# Allegro board stlink.brd
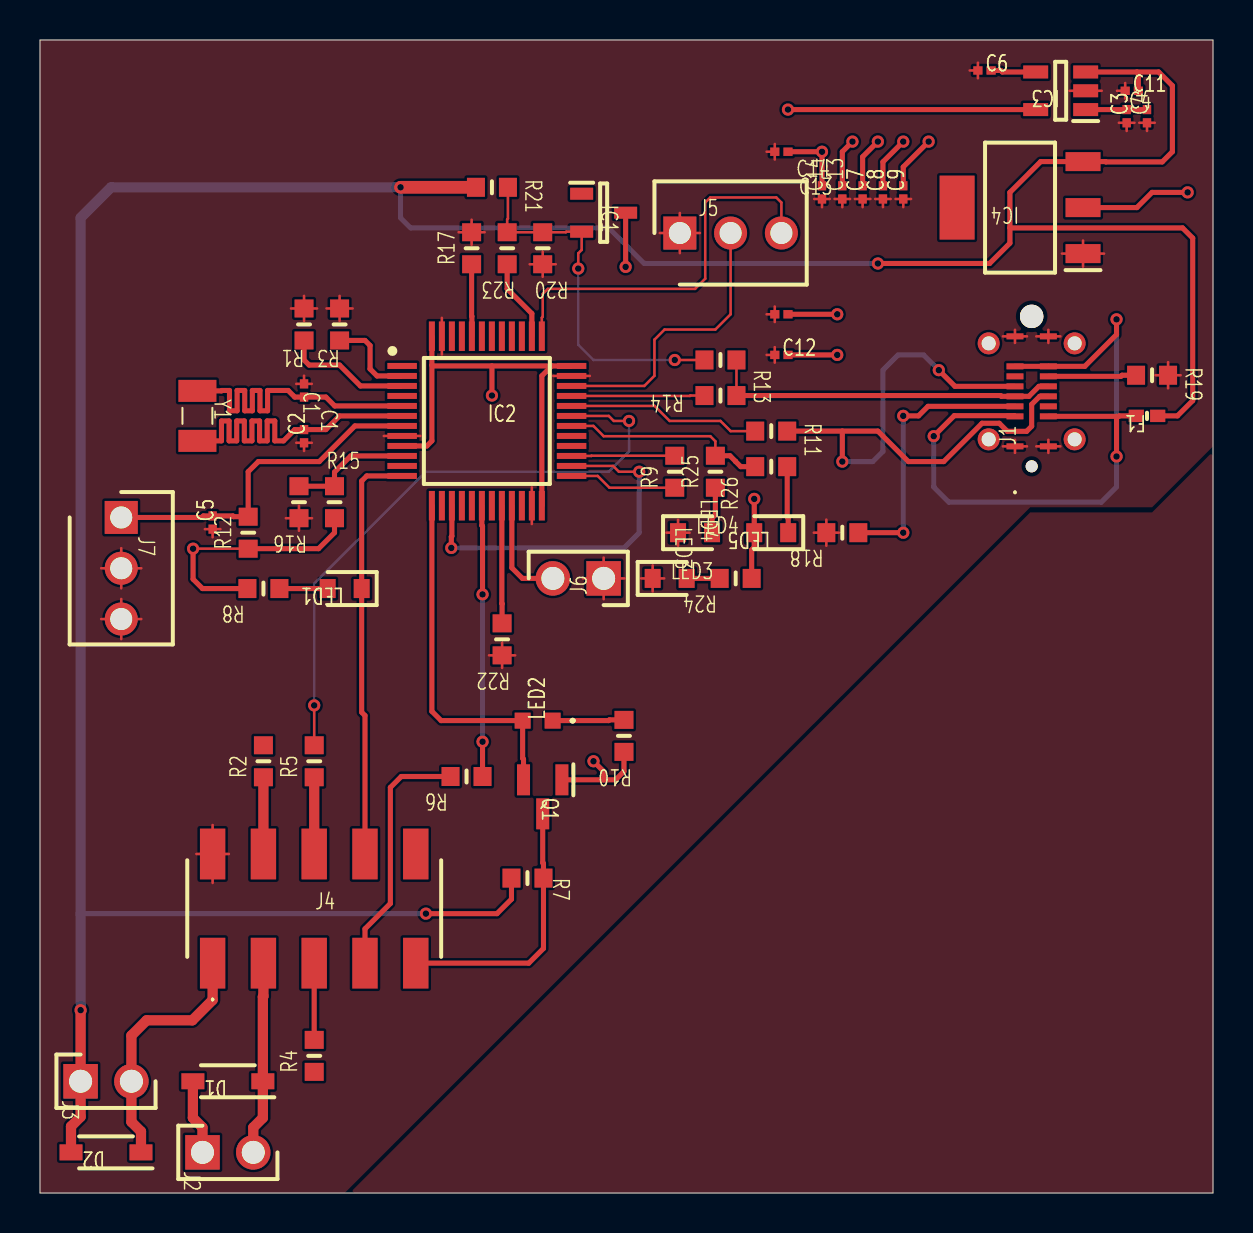
[diagram p0: board, top side]
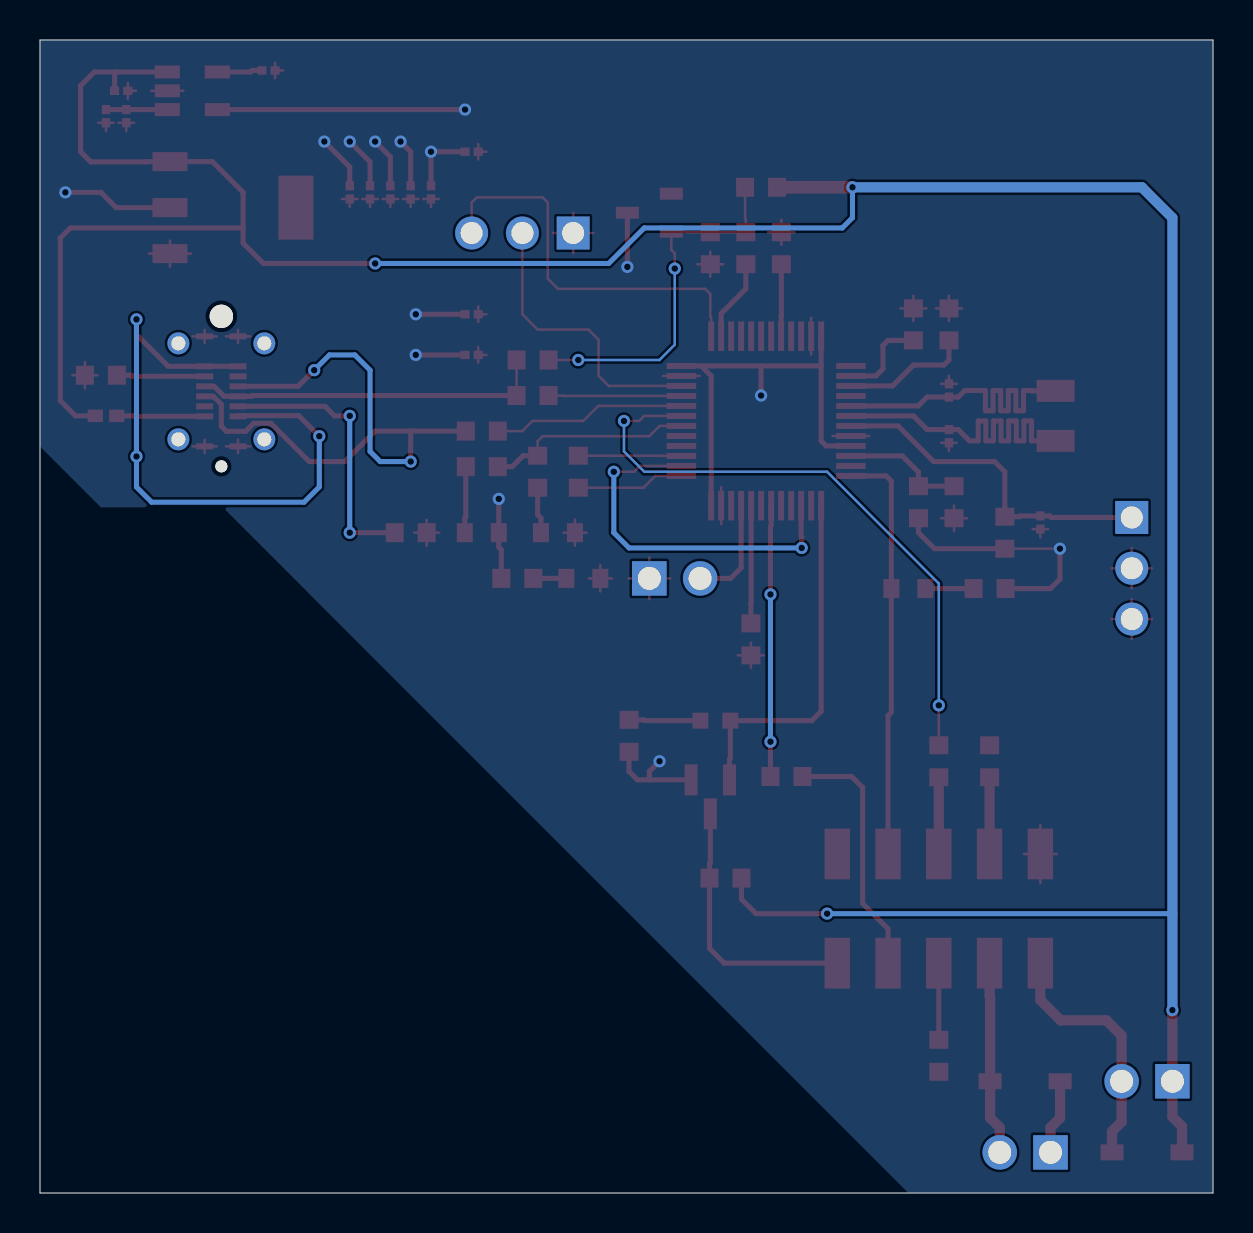
[diagram p1: board, bottom side, seen from below]

Outline 58.67 x 57.66 mm; copper layers: TOP, BOTTOM. Coordinates in mm from the lower left corner of the outline.
Outline path: 0,57.66 0,0 58.67,0 58.67,57.66 0,57.66

## Design rules (mm)
constraint set DEFAULT: min track width 0.127
net group DN: nets DN USB_DM
net group RESET: nets N06427 RESET
net group SWO: nets N06435 SWO
net group +5V: nets DP N06887 N27475 USB_DP
net group LED_LINK: nets LED_LINK N09917 N09921

## Placement (name value [footprint] x y rotation side)
C1  20p  [CAPC0603X33N]  13.21 40.13 270 top
C2  20p  [CAPC0603X33N]  13.21 37.85 90 top
C3  1u  [CAPC0603X33N]  54.36 53.85 90 top
C4  100n  [CAPC0603X33N]  55.37 53.85 90 top
C5  100n  [CAPC0603X33N]  8.64 33.53 90 top
C6  22n  [CAPC0603X33N]  47.24 56.13 0 top
C7  10u  [CAPC0603X33N]  41.15 50.04 90 top
C8  100n  [CAPC0603X33N]  42.16 50.04 90 top
C9  20p  [CAPC0603X33N]  43.18 50.04 90 top
C10  20p  [CAPC0603X33N]  37.08 43.94 0 top
C11  20p  [CAPC0603X33N]  54.61 55.12 0 top
C12  100n  [CAPC0603X33N]  37.08 41.91 0 top
C13  100n  [CAPC0603X33N]  40.13 50.04 90 top
C14  100n  [CAPC0603X33N]  39.12 50.04 90 top
C15  100n  [CAPC0603X33N]  37.08 52.07 0 top
D1  MBR0520LT3G  [SOD3716X135N]  9.4 5.59 180 top
D2  MBR0520LT3G  [SOD3716X135N]  3.3 2.03 180 top
F1  SF-0402F050-2  [FUSC1005X40N]  55.37 38.86 180 top
IC1  MMS9013-L-TP  [SOT95P237X125-3N]  28.19 49.02 0 top
IC2  STM32F103CBT6  [QFP50P900X900X160-48N]  22.35 38.61 0 top
IC3  RT9193-33GB  [SOT94P279X130-5N]  51.05 55.12 180 top
IC4  LM1117MPX-33NOPB  [SOT230P700X180-4N]  49.02 49.28 180 top
J1  219320-0001  [2193200001]  48.77 37.34 90 top
J2  JUMPER  [HDRV2W67P254_2X1_254X483X858P]  8.13 2.03 270 top
J3  JUMPER  [HDRV2W67P254_2X1_254X483X858P]  2.03 5.59 270 top
J4  95278-401A10LF  [95278401A10LF]  13.72 14.22 0 top
J5  69167-103  [SHDR3W64P0X254_1X3_762X516X980P]  32 48.01 0 top
J6  JUMPER  [HDRV2W67P254_2X1_254X483X858P]  28.19 30.73 90 top
J7  69167-103  [SHDR3W64P0X254_1X3_762X516X980P]  4.06 33.78 270 top
LED1  SM0603GCL  [LEDC1608X60N]  15.24 30.23 180 top
LED2  -  [SM0603SRC]  24.89 23.62 90 top
LED3  SM0603GCL  [LEDC1608X60N]  31.5 30.73 0 top
LED4  SM0603GCL  [LEDC1608X60N]  32.77 33.02 0 top
LED5  SM0603GCL  [LEDC1608X60N]  36.58 33.02 180 top
Q1  2N7002  [SOT96P240X120-3N]  25.15 19.81 270 top
R1  10K  [RESC1608X55N]  13.21 43.43 270 top
R2  22  [RESC1608X55N]  11.18 21.59 90 top
R3  10K  [RESC1608X55N]  14.99 43.43 270 top
R4  22  [RESC1608X55N]  13.72 6.86 90 top
R5  22  [RESC1608X55N]  13.72 21.59 90 top
R6  22  [RESC1608X55N]  21.34 20.83 180 top
R7  1K  [RESC1608X55N]  24.38 15.75 0 top
R8  1K  [RESC1608X55N]  11.18 30.23 180 top
R9  100  [RESC1608X55N]  31.75 36.07 90 top
R10  1K  [RESC1608X55N]  29.21 22.86 270 top
R11  0  [RESC1608X55N]  36.58 38.1 0 top
R12  100K  [RESC1608X55N]  10.41 33.02 90 top
R13  0  [RESC1608X55N]  34.04 39.88 0 top
R14  1K5  [RESC1608X55N]  34.04 41.66 180 top
R15  4K7  [RESC1608X55N]  14.73 34.54 90 top
R16  4K7  [RESC1608X55N]  12.95 34.54 270 top
R17  10K  [RESC1608X55N]  21.59 47.24 90 top
R18  5.1K  [RESC1608X55N]  40.13 33.02 180 top
R19  5.1K  [RESC1608X55N]  55.63 40.89 0 top
R20  36K  [RESC1608X55N]  25.15 47.24 270 top
R21  10K  [RESC1608X55N]  22.61 50.29 0 top
R22  10K  [RESC1608X55N]  23.11 27.69 270 top
R23  100  [RESC1608X55N]  23.37 47.24 270 top
R24  10K  [RESC1608X55N]  34.8 30.73 180 top
R25  1K  [RESC1608X55N]  33.78 36.07 90 top
R26  1K  [RESC1608X55N]  36.58 36.32 180 top
Y1  ABS07-32  [ABS07]  7.87 38.86 270 top

## Library data of the parts
C1-C15 = GRM033D70E105ME15D
D1 D2 = MBR0520LT3G
F1 = SF-0402F050-2
IC1 = MMS9013-L-TP
IC2 = STM32F103CBT6
IC3 = RT9193-33GB
IC4 = LM1117MPX-33NOPB
J1 = 219320-0001
J2 J3 J6 = 67996-100HLF
J4 = 95278-401A10LF
J5 J7 = 69167-103
LED1 LED3-LED5 = SM0603GCL
LED2 = SM0603SRC
Q1 = 2N7002
R1-R26 = CR0603-F_-1R00ELF
Y1 = ABS07-32.768KHZ-T

## Footprints (pads in the part's own frame, mm; a bottom-side part is the same pattern mirrored in y, then rotated)
95278401A10LF
  rect 1.27x2.54 smd: 1(-5.08,-2.73) 2(-5.08,2.73) 3(-2.54,-2.73) 4(-2.54,2.73) 5(0,-2.73) 6(0,2.73) 7(2.54,-2.73) 8(2.54,2.73) 9(5.08,-2.73) 10(5.08,2.73)
2193200001
  round 0.6 hole 0.6 unplated: (-1,-0.835)
  round 1.17 hole 1.17 unplated: (6.5,-0.835)
  rect 0.3x0.85 smd: A1(0,0) A4(1.5,0) A5(2,0) A6(2.5,0) A7(3,0) A8(3.5,0) A9(4,0) A12(5.5,0) B1(5.5,-1.67) B4(4,-1.67) B5(3.5,-1.67) B6(3,-1.67) B7(2.5,-1.67) B8(2,-1.67) B9(1.5,-1.67) B12(0,-1.67)
  round 1.1 hole 0.7: MH3(0.35,1.315) MH4(5.15,1.315) MH5(5.15,-2.985) MH6(0.35,-2.985)
ABS07
  rect 1.1x1.9 smd: 1(-1.25,0) 2(1.25,0)
CAPC0603X33N
  rect 0.46x0.42 smd: 1(-0.33,0) 2(0.33,0)
FUSC1005X40N
  rect 0.76x0.62 smd: 1(-0.535,0) 2(0.535,0)
HDRV2W67P254_2X1_254X483X858P
  rect 1.725x1.725 hole 1.15: 1(0,0)
  round 1.725 hole 1.15: 2(0,2.54)
LEDC1608X60N
  rect 0.8x0.95 smd: 1(-0.85,0) 2(0.85,0)
QFP50P900X900X160-48N
  rect 1.475x0.3 smd: 1(-4.238,2.75) 2(-4.238,2.25) 3(-4.238,1.75) 4(-4.238,1.25) 5(-4.238,0.75) 6(-4.238,0.25) 7(-4.238,-0.25) 8(-4.238,-0.75) 9(-4.238,-1.25) 10(-4.238,-1.75) 11(-4.238,-2.25) 12(-4.238,-2.75) 25(4.238,-2.75) 26(4.238,-2.25) 27(4.238,-1.75) 28(4.238,-1.25) 29(4.238,-0.75) 30(4.238,-0.25) 31(4.238,0.25) 32(4.238,0.75) 33(4.238,1.25) 34(4.238,1.75) 35(4.238,2.25) 36(4.238,2.75)
  rect 0.3x1.475 smd: 13(-2.75,-4.238) 14(-2.25,-4.238) 15(-1.75,-4.238) 16(-1.25,-4.238) 17(-0.75,-4.238) 18(-0.25,-4.238) 19(0.25,-4.238) 20(0.75,-4.238) 21(1.25,-4.238) 22(1.75,-4.238) 23(2.25,-4.238) 24(2.75,-4.238) 37(2.75,4.238) 38(2.25,4.238) 39(1.75,4.238) 40(1.25,4.238) 41(0.75,4.238) 42(0.25,4.238) 43(-0.25,4.238) 44(-0.75,4.238) 45(-1.25,4.238) 46(-1.75,4.238) 47(-2.25,4.238) 48(-2.75,4.238)
RESC1608X55N
  rect 0.9x0.95 smd: 1(-0.8,0) 2(0.8,0)
SHDR3W64P0X254_1X3_762X516X980P
  rect 1.65x1.65 hole 1.1: 1(0,0)
  round 1.65 hole 1.1: 2(2.54,0) 3(5.08,0)
SM0603SRC
  rect 0.8x0.8 smd: 1(0,-0.75) 2(0,0.75)
SOD3716X135N
  rect 1.15x0.8 smd: 1(-1.75,0) 2(1.75,0)
SOT94P279X130-5N
  rect 1.25x0.65 smd: 1(-1.25,0.94) 2(-1.25,0) 3(-1.25,-0.94) 4(1.25,-0.94) 5(1.25,0.94)
SOT95P237X125-3N
  rect 1.15x0.6 smd: 1(-1.1,0.95) 2(-1.1,-0.95) 3(1.1,0)
SOT96P240X120-3N
  rect 1.55x0.65 smd: 1(-0.85,0.96) 2(-0.85,-0.96) 3(0.85,0)
SOT230P700X180-4N
  rect 1.75x0.95 smd: 1(-3.15,2.3) 2(-3.15,0) 3(-3.15,-2.3)
  rect 1.75x3.2 smd: 4(3.15,0)

## Nets
+3V3: C7.2 C8.2 C9.2 C10.2 C12.2 C13.2 C14.2 C15.2 IC1.3 IC2.9 IC2.24 IC2.36 IC2.48 IC3.5(\VOUT\) IC4.2 LED5.2 Q1.1 R8.2 R10.2 R12.1 R15.1 R24.1
+5V: C11.2 D2.2 F1.1 IC3.3 IC4.3 J3.1 R7.1 R21.1
GND: C1.1 C2.1 C3.1 C4.1 C5.1 C6.1 C7.1 C8.1 C9.1 C10.1 C11.1 C12.1 C13.1 C14.1 C15.1 IC2.8 IC2.23 IC2.35 IC2.47(\VSS_3\) IC3.2 IC4.1 J1.A1 J1.A12 J1.B1 J1.B12 J4.2 J5.1 J6.1 J7.2 J7.3 LED3.1(\K\) LED4.1(\K\) R1.1 R3.1 R16.2 R17.2 R18.2 R19.2 R20.2 R22.2
VBAT: IC2.1
BOOT_0: IC2.44 R17.1
BOOT_1: IC2.20 R22.1
DN: J1.A7 J1.B7 R11.2
DP: J1.A6(\[DP1\) J1.B6 R13.2 R14.1
FUSE: F1.2 J1.A4 J1.A9 J1.B4 J1.B9
LED_LINK: IC2.30 R25.2 R26.2
PA0: IC2.10 R15.2 R16.1
RESET: IC2.18 R6.1
RST: C5.2 IC2.7 J7.1 R12.2
RX: IC2.13 LED2.2(\K\) Q1.2(\S\)
SWCLK: IC2.15 IC2.26 R4.1
SWCLK_IN: IC2.37 J5.3
SWDIO: IC2.25 R2.2 R9.1
SWDIO_IN: IC2.34 J5.2
SWO: IC2.31 R5.2
TX: IC2.12 J4.8 LED1.1(\K\)
USB_DM: IC2.32 R11.1
USB_DP: IC2.33 R13.1
USB_RENUM: IC2.38 R23.2
N00368: IC2.2 R3.2
N00410: IC2.3 R1.2
N00775: C1.2 IC2.5 Y1.1
N00782: C2.2 IC2.6 Y1.2
N01382: IC2.21 J6.2
N02734: IC2.27 R9.2
N04880: D2.1(\K\) J3.2 J4.1
N05760: D1.2 J2.1
N05764: D1.1(\K\) J2.2 J4.3
N06309: J4.4 R2.1
N06427: J4.7 R6.2
N06431: J4.5 R4.2
N06435: J4.6 R5.1
N06707: LED1.2 R8.1
N06887: J4.9 Q1.3 R7.2
N07180: LED2.1 R10.1
N08768: LED3.2 R24.2
N09917: LED4.2 R25.1
N09921: LED5.1(\K\) R26.1
N11997: C3.2 C4.2 IC3.1
N13004: C6.2 IC3.4
N27475: IC1.2(\E\) R14.2 R20.1 R21.2 R23.1
N30478: J1.B5 R19.1
N30510: J1.A5 R18.1

Pads without a net: IC1 1; IC2 4 11 14 16 17 19 22 28 29 39 40 41 42 43 45 46; IC4 4; J1 A8 B8 MH3 MH4 MH5 MH6; J4 10

## Via types
v1: diameter 0.61, hole 0.33, TOP to BOTTOM, 33 vias

## Routing (per net, layer and track width the routed paths; a pad name or vN(x,y) marks a point on that pad's centre or on a via; arc(x,y) is an arc through that point)
+3V3: length 83.8
  TOP w0.127: R12.1 v1(7.66,32.22)
  TOP w0.254: v1(7.66,32.22) 7.66,30.7 8.13,30.23 R8.2 ; C10.2 v1(39.88,43.94) ; IC2.9 19.35,37.36 19.6,37.61 19.6,41.4 ; 19.6,41.4 19.65,41.36 22.61,41.36 ; 19.6,41.4 IC2.48 ; 22.61,41.36 25.6,41.36 ; 22.61,41.36 v1(22.61,39.88) ; 28.19,20.66 28.19,21.08 v1(27.69,21.59) ; 28.19,20.66 28.79,20.66 29.21,21.08 R10.2 ; 28.19,20.66 Q1.1 ; v1(43.18,52.58) 42.16,51.56 C8.2 ; v1(44.45,52.58) 43.18,51.31 C9.2 ; C13.2 40.13,52.07 v1(40.64,52.58) ; 25.6,41.36 25.1,40.86 IC2.24 ; 25.6,41.36 IC2.36 ; v1(57.4,50.04) 55.63,50.04 54.86,49.28 IC4.2 ; C14.2 v1(39.12,52.07) C15.2 ; IC1.3 v1(29.29,46.31) ; v1(35.73,34.71) LED5.2 35.73,32.29 35.6,32.16 R24.1 ; C12.2 v1(39.88,41.91) ; R15.1 14.73,33.02 13.93,32.22 R12.1 ; v1(41.91,52.58) 41.15,51.82 C7.2 ; IC3.5 v1(37.41,54.18)
+5V: length 163.6
  TOP w0.254: 54.86,56.06 55.96,56.06 56.64,55.37 56.64,52.07 56.13,51.56 53.32,51.56 53.3,51.58 IC4.3 50.05,51.58 48.51,50.04 48.51,48.26 ; 54.86,56.06 IC3.3 ; 54.86,56.06 54.94,55.98 C11.2 ; 48.51,48.26 57.15,48.26 57.66,47.75 57.66,39.62 56.9,38.86 F1.1 ; 48.51,48.26 48.51,47.5 47.5,46.48 v1(41.91,46.48) ; v1(19.3,13.97) 22.86,13.97 23.58,14.69 R7.1
  TOP w0.512: D2.2 1.55,3.33 2.03,3.81 J3.1 v1(2.03,9.14)
  TOP w0.635: R21.1 v1(18.03,50.29)
  BOTTOM w0.254: v1(19.3,13.97) 2.03,13.97 ; v1(18.03,50.29) 18.03,48.77 18.54,48.26 28.45,48.26 30.23,46.48 v1(41.91,46.48)
  BOTTOM w0.512: v1(2.03,9.14) 2.03,48.77 3.56,50.29 v1(18.03,50.29)
GND: length 83.7
  TOP w0.127: J5.1 33.01,48.01 ; J5.1 31,48.01 ; J5.1 32,47 ; J5.1 32,49.01 ; 48.16,42.84 J1.A12 ; J1.A12 48.77,43.17 ; J1.A12 48.77,42.51 ; J1.A12 49.37,42.84 ; C4.1 55.76,53.52 ; C4.1 54.98,53.52 ; C4.1 55.37,53.11 ; R18.2 39.96,33.02 ; R18.2 38.7,33.02 ; R18.2 39.33,33.67 ; R18.2 39.33,32.37 ; 48.16,37.34 J1.A1 ; J1.A1 49.37,37.34 ; J1.A1 48.77,37.67 ; J1.A1 48.77,37.01 ; 36.75,41.52 C12.1 ; C12.1 36.35,41.91 ; C12.1 36.75,42.3 ; 12.3,33.74 R16.2 ; R16.2 12.95,34.37 ; R16.2 12.95,33.12 ; R16.2 13.61,33.74 ; C1.1 13.21,40.87 ; C1.1 13.6,40.46 ; C1.1 12.82,40.46 ; C2.1 13.6,37.52 ; C2.1 12.82,37.52 ; C2.1 13.21,37.11 ; 56.43,40.24 R19.2 ; R19.2 56.43,41.55 ; R19.2 57.05,40.89 ; R19.2 55.8,40.89 ; 36.75,43.55 C10.1 ; C10.1 36.35,43.94 ; C10.1 36.75,44.33 ; 49.83,42.84 J1.B1 ; J1.B1 51.04,42.84 ; J1.B1 50.44,42.51 ; J1.B1 50.44,43.17 ; 25.67,40.86 IC2.35 27.51,40.86 ; C9.1 43.57,49.71 ; C9.1 42.79,49.71 ; C9.1 43.18,49.3 ; 20.94,48.04 R17.2 ; R17.2 22.24,48.04 ; R17.2 21.59,48.67 ; R17.2 21.59,47.42 ; R3.1 14.99,44.86 ; R3.1 14.33,44.23 ; R3.1 15.64,44.23 ; R3.1 14.99,43.61 ; LED4.1 31.92,33.67 ; LED4.1 32.49,33.02 ; LED4.1 31.34,33.02 ; LED4.1 31.92,32.37 ; J7.2 5.07,31.24 ; J7.2 4.06,30.24 ; J7.2 4.06,32.25 ; J7.2 3.06,31.24 ; 25.15,45.82 R20.2 ; R20.2 25.15,47.07 ; R20.2 25.8,46.44 ; R20.2 24.49,46.44 ; 40.13,49.3 C13.1 ; C13.1 39.74,49.71 ; C13.1 40.52,49.71 ; 28.19,29.69 J6.1 ; J6.1 28.19,31.77 ; J6.1 27.15,30.73 ; J6.1 29.23,30.73 ; 22.46,26.89 R22.2 ; R22.2 23.11,27.51 ; R22.2 23.77,26.89 ; R22.2 23.11,26.26 ; C8.1 42.55,49.71 ; C8.1 41.78,49.71 ; C8.1 42.16,49.3 ; C15.1 36.75,52.46 ; C15.1 36.35,52.07 ; C15.1 36.75,51.68 ; 17.2,37.86 IC2.8 19.03,37.86 ; LED3.1 30.65,31.39 ; LED3.1 31.22,30.73 ; LED3.1 30.07,30.73 ; LED3.1 30.65,30.08 ; R1.1 13.86,44.23 ; R1.1 13.21,44.86 ; R1.1 12.55,44.23 ; R1.1 13.21,43.61 ; C3.1 54.74,53.52 ; C3.1 53.97,53.52 ; C3.1 54.36,53.11 ; C7.1 41.54,49.71 ; C7.1 40.76,49.71 ; C7.1 41.15,49.3 ; 8.25,33.2 C5.1 ; C5.1 9.02,33.2 ; C5.1 8.64,32.79 ; 52.17,46.32 IC4.1 ; IC4.1 53.23,46.98 ; IC4.1 51.12,46.98 ; IC4.1 52.17,47.63 ; J1.B12 51.04,37.34 ; J1.B12 49.83,37.34 ; J1.B12 50.44,37.01 ; J1.B12 50.44,37.67 ; J4.2 8.64,18.4 ; J4.2 9.45,16.95 ; J4.2 7.82,16.95 ; J4.2 8.64,15.51 ; 53.87,55.12 C11.1 ; C11.1 54.28,55.51 ; C11.1 54.28,54.73 ; 4.06,27.7 J7.3 ; J7.3 5.07,28.7 ; J7.3 3.06,28.7 ; J7.3 4.06,29.7 ; C6.1 46.91,56.52 ; C6.1 46.51,56.13 ; C6.1 46.91,55.75 ; 20.1,43.76 IC2.47 20.1,41.93 ; 39.12,49.3 C14.1 ; C14.1 39.5,49.71 ; C14.1 38.73,49.71 ; 51.5,55.12 IC3.2 53.11,55.12 ; 24.6,35.29 IC2.23 24.6,33.45
BOOT_0: length 3.6
  TOP w0.254: R17.1 21.59,43.85 21.6,43.84 IC2.44
BOOT_1: length 5.9
  TOP w0.254: R22.1 23.11,29.46 23.1,29.48 IC2.20
DN: length 31.4
  TOP w0.254: 40.13,38.1 41.91,38.1 43.43,36.58 45.2,36.58 47.12,38.49 47.98,38.49 48.39,38.09 49.35,38.09 49.6,38.34 49.6,39.44 50,39.84 J1.B7 ; 40.13,38.1 v1(40.13,36.58) ; 40.13,38.1 R11.2 ; v1(44.96,41.15) 45.77,40.34 J1.A7
  BOTTOM w0.254: v1(40.13,36.58) 41.66,36.58 42.16,37.08 42.16,41.15 42.93,41.91 44.2,41.91 v1(44.96,41.15)
DP: length 17.6
  TOP w0.127: R14.1 R13.2
  TOP w0.254: R13.2 48.05,39.88 48.09,39.84 J1.A6 49.46,39.84 49.96,40.34 J1.B6
FUSE: length 38.1
  TOP w0.254: v1(53.85,43.69) 53.85,42.93 52.26,41.34 J1.B4 J1.A9 ; v1(44.7,37.85) 45.73,38.87 48.73,38.87 J1.A4 ; 53.85,38.84 J1.B9 ; 53.85,38.84 v1(53.85,36.83) ; 53.85,38.84 53.96,38.84 53.98,38.86 F1.2
  BOTTOM w0.254: v1(44.7,37.85) 44.7,35.31 45.47,34.54 53.09,34.54 53.85,35.31 v1(53.85,36.83) v1(53.85,43.69)
LED_LINK: length 10.5
  TOP w0.127: IC2.30 27.68,38.36 28.19,37.85 33.53,37.85 33.78,37.59 R25.2
  TOP w0.254: R26.2 35.05,36.32 34.79,36.58 34.79,36.59 34.51,36.87 R25.2
PA0: length 6.2
  TOP w0.254: R16.1 R15.2 14.73,36.05 15.54,36.86 IC2.10
RESET: length 13.6
  TOP w0.254: v1(22.14,29.93) 22.14,33.34 22.1,33.38 IC2.18 ; R6.1 v1(22.14,22.57)
  BOTTOM w0.254: v1(22.14,22.57) v1(22.14,29.93)
RST: length 17.3
  TOP w0.254: J7.1 8.1,33.78 8.17,33.86 C5.2 9.65,33.86 9.68,33.82 R12.2 10.41,36.07 10.92,36.58 13.97,36.58 15.75,38.36 IC2.7
RX: length 18
  TOP w0.254: Q1.2 24.19,21.69 24.14,21.73 LED2.2 20.07,23.62 19.6,24.09 IC2.13
SWCLK: length 18.4
  TOP w0.127: IC2.26 28.67,36.36 28.96,36.07 v1(29.97,36.07)
  TOP w0.254: v1(20.57,32.26) 20.57,32.82 20.6,32.84 IC2.15
  BOTTOM w0.254: v1(20.57,32.26) 29.21,32.26 29.97,33.02 v1(29.97,36.07)
SWCLK_IN: length 19.9
  TOP w0.127: IC2.37 25.1,43.77 25.15,43.82 25.15,44.96 25.4,45.21 32.77,45.21 33.27,45.72 33.27,49.53 33.53,49.78 36.83,49.78 37.08,49.53 J5.3
SWDIO: length 5.4
  TOP w0.127: R9.1 28.49,35.27 27.9,35.86 IC2.25
SWDIO_IN: length 14.6
  TOP w0.127: IC2.34 30.23,40.36 30.73,40.87 30.73,42.67 31.24,43.18 33.78,43.18 34.54,43.94 J5.2
SWO: length 31.1
  TOP w0.127: v1(29.46,38.61) 28.7,38.61 28.45,38.86 IC2.31 ; v1(13.72,24.38) R5.2
  BOTTOM w0.127: v1(29.46,38.61) 29.46,37.08 28.45,36.07 19.3,36.07 13.72,30.48 v1(13.72,24.38)
TX: length 20.8
  TOP w0.254: J4.8 16.26,23.88 16.09,24.04 LED1.1 16.09,35.6 16.34,35.86 IC2.12
USB_DM: length 9.7
  TOP w0.127: IC2.32 30.75,39.36 31.5,38.61 34.04,38.61 34.54,38.1 R11.1
USB_DP: length 6.7
  TOP w0.127: IC2.33 32.51,39.86 32.53,39.88 R13.1
USB_RENUM: length 4.1
  TOP w0.254: IC2.38 24.6,43.98 23.37,45.21 R23.2
N00368: length 4.6
  TOP w0.254: IC2.2 16.86,40.86 16.51,41.21 16.51,42.38 16.26,42.63 R3.2
N00410: length 6.4
  TOP w0.254: IC2.3 16.03,40.36 14.99,41.4 13.46,41.4 13.21,41.66 R1.2
N00775: length 16.7
  TOP w0.254: IC2.5 14.74,39.36 14.3,39.8 C1.2 12.74,39.8 12.41,40.13 11.38,40.13 11.38,39.12 11,39.12 11,40.13 10.62,40.13 10.62,39.12 10.24,39.12 10.24,40.13 9.86,40.13 9.86,39.12 9.48,39.12 9.48,40.13 9.1,40.13 9.08,40.11 Y1.1
N00782: length 18.7
  TOP w0.254: Y1.2 9.08,37.61 9.08,38.61 9.46,38.61 9.46,37.61 9.84,37.61 9.84,38.61 10.22,38.61 10.22,37.61 10.6,37.61 10.6,38.61 10.98,38.61 10.98,37.61 11.36,37.61 11.36,38.61 11.74,38.61 11.74,37.61 12.18,37.61 12.74,38.18 C2.2 14.3,38.18 14.98,38.86 IC2.6
N01382: length 5.4
  TOP w0.254: IC2.21 23.6,31.26 24.13,30.73 J6.2
N02734: length 5.2
  TOP w0.127: IC2.27 27.58,36.86 27.59,36.87 R9.2
N04880: length 12.7
  TOP w0.512: J4.1 8.64,9.65 7.62,8.64 5.33,8.64 4.57,7.87 J3.2 4.57,3.56 5.05,3.08 D2.1
N05760: length 3.8
  TOP w0.512: J2.1 8.13,3.28 7.65,3.76 D1.2
N05764: length 9.7
  TOP w0.512: J2.2 10.67,3.28 11.15,3.76 D1.1 11.15,9.81 11.18,9.84 J4.3
N06309: length 3.8
  TOP w0.512: R2.1 J4.4
N06427: length 12.5
  TOP w0.254: J4.7 16.26,13.21 17.53,14.48 17.53,20.28 18.07,20.83 R6.2
N06431: length 3.8
  TOP w0.254: R4.2 J4.5
N06435: length 3.8
  TOP w0.512: R5.1 J4.6
N06707: length 2.4
  TOP w0.254: LED1.2 R8.1
N06887: length 13.4
  TOP w0.254: J4.9 24.45,11.49 25.18,12.23 R7.2 25.18,16.48 25.15,16.51 Q1.3
N07180: length 3.6
  TOP w0.254: R10.1 28.48,23.66 28.44,23.62 LED2.1
N08768: length 1.7
  TOP w0.254: LED3.2 R24.2
N09917: length 2.3
  TOP w0.254: R25.1 33.78,33.91 33.62,33.75 LED4.2
N09921: length 3.3
  TOP w0.254: R26.1 37.38,33.8 37.43,33.75 LED5.1
N11997: length 3.1
  TOP w0.254: C4.2 C3.2 IC3.1
N13004: length 2.3
  TOP w0.254: C6.2 48.06,56.13 48.13,56.06 IC3.4
N27475: length 18.4
  TOP w0.127: R21.2 23.41,48.72 23.37,48.68 R23.1 R20.1 26.3,48.04 26.33,48.07 IC1.2 27.09,47.16 26.92,46.99 v1(26.92,46.23) ; R14.2 v1(31.75,41.66)
  BOTTOM w0.127: v1(31.75,41.66) 27.69,41.66 26.92,42.42 v1(26.92,46.23)
N30478: length 4.4
  TOP w0.254: J1.B5 54.07,40.84 54.12,40.89 R19.1
N30510: length 13.9
  TOP w0.254: v1(43.18,38.86) 43.94,38.86 44.42,39.34 J1.A5 ; v1(43.18,33.02) R18.1
  BOTTOM w0.254: v1(43.18,38.86) v1(43.18,33.02)

## Copper pours and planes (outline as drawn; the poured copper is in the pictures)
+3V3 on BOTTOM: 0,57.66 0,0 15.24,0 49.53,34.29 55.63,34.29 58.67,37.34 58.67,57.66
+5V on TOP: 58.67,37.08 55.63,34.04 49.53,34.04 15.49,0 58.67,0
GND on TOP: 0,57.66 58.67,57.66 58.67,37.34 55.63,34.29 49.53,34.29 15.24,0 0,0
